# Altium PCB LCDTest2.PcbDoc
Units mil, origin at the board's own origin, x right, y up, seen from the top; angles counter-clockwise.
Board outline 1968.5 x 1968.5 mil, 4 copper layers (Top Layer, Internal Plane 1, Signal Layer 1, Bottom Layer), stack 28.35 mil thick; 154 components, 147 nets, 801 pads, 2 vias.
Unrouted connection lines stored in the file: 454.
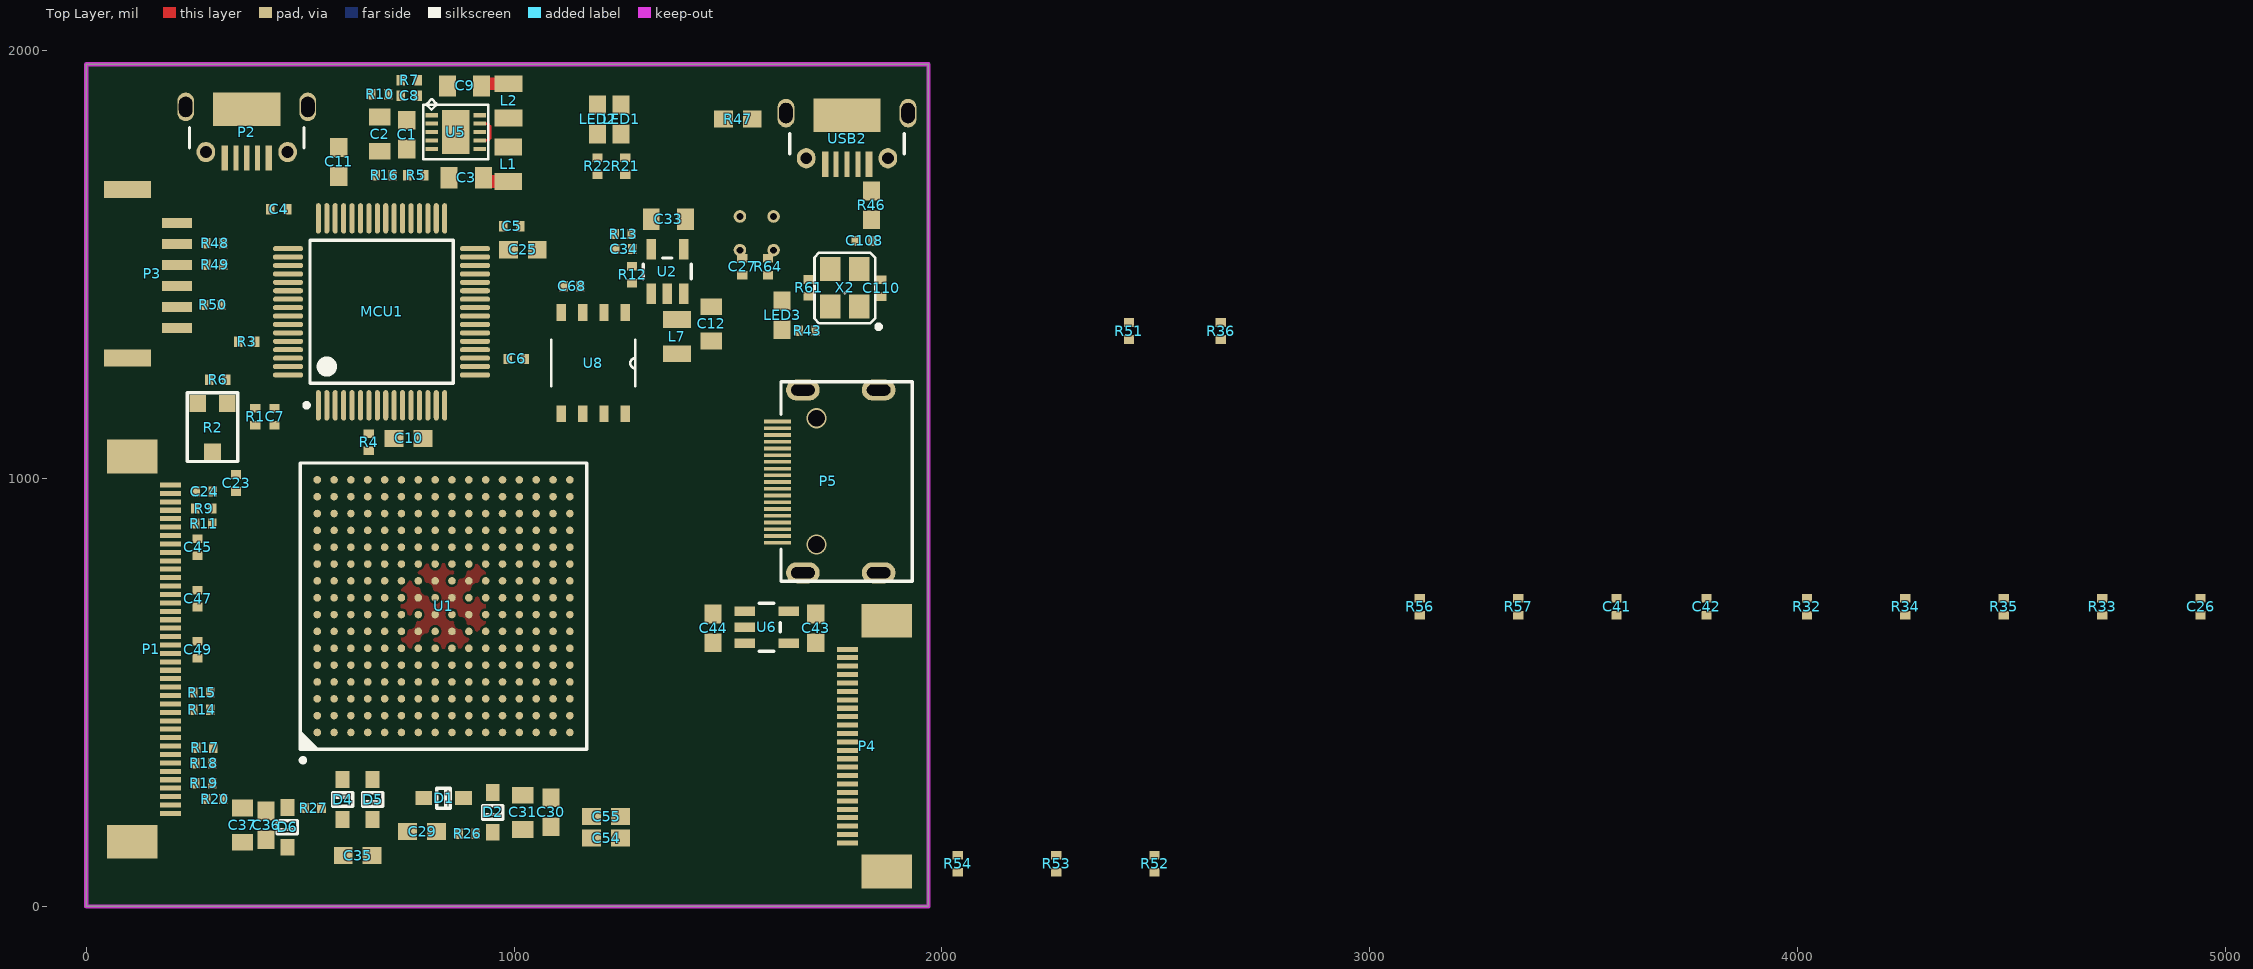
[diagram p0: Top Layer view]
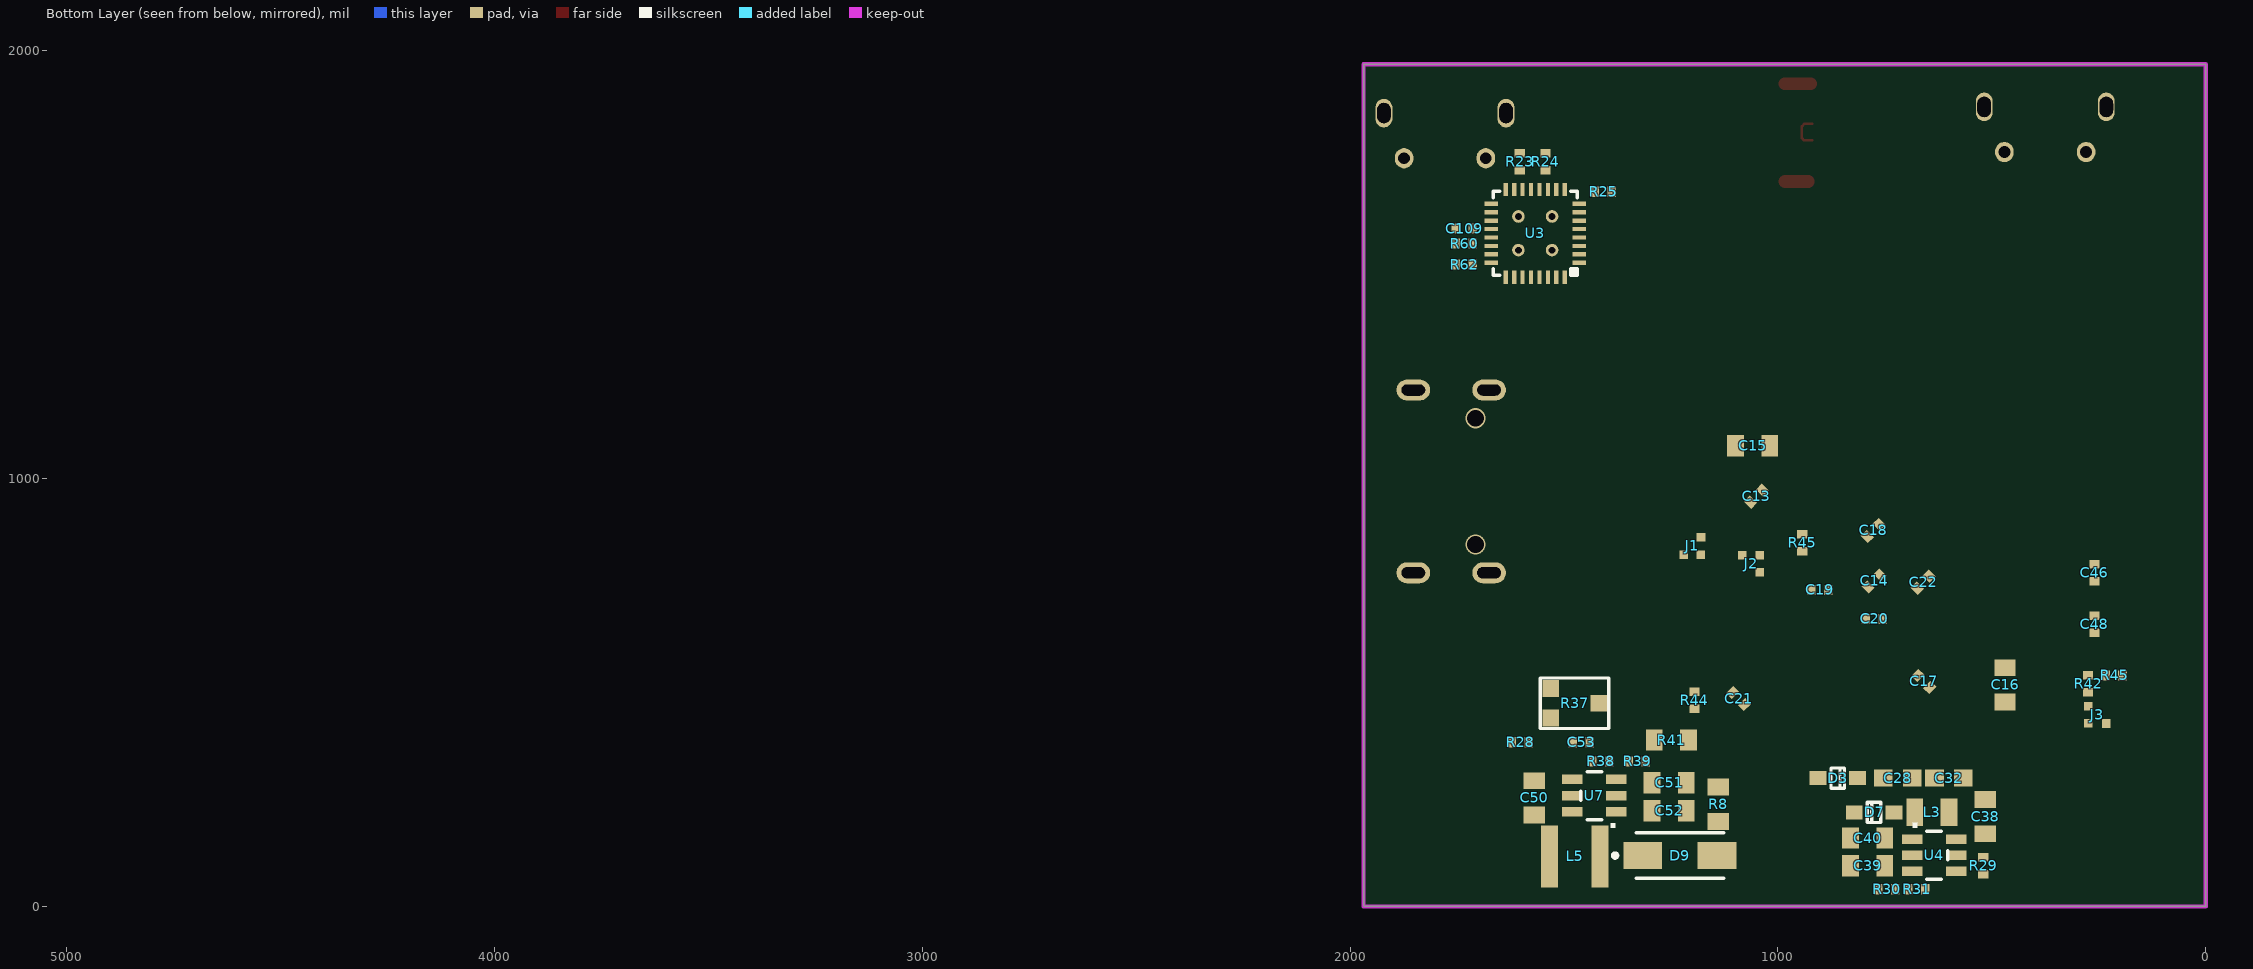
[diagram p1: Bottom Layer view, seen from below]
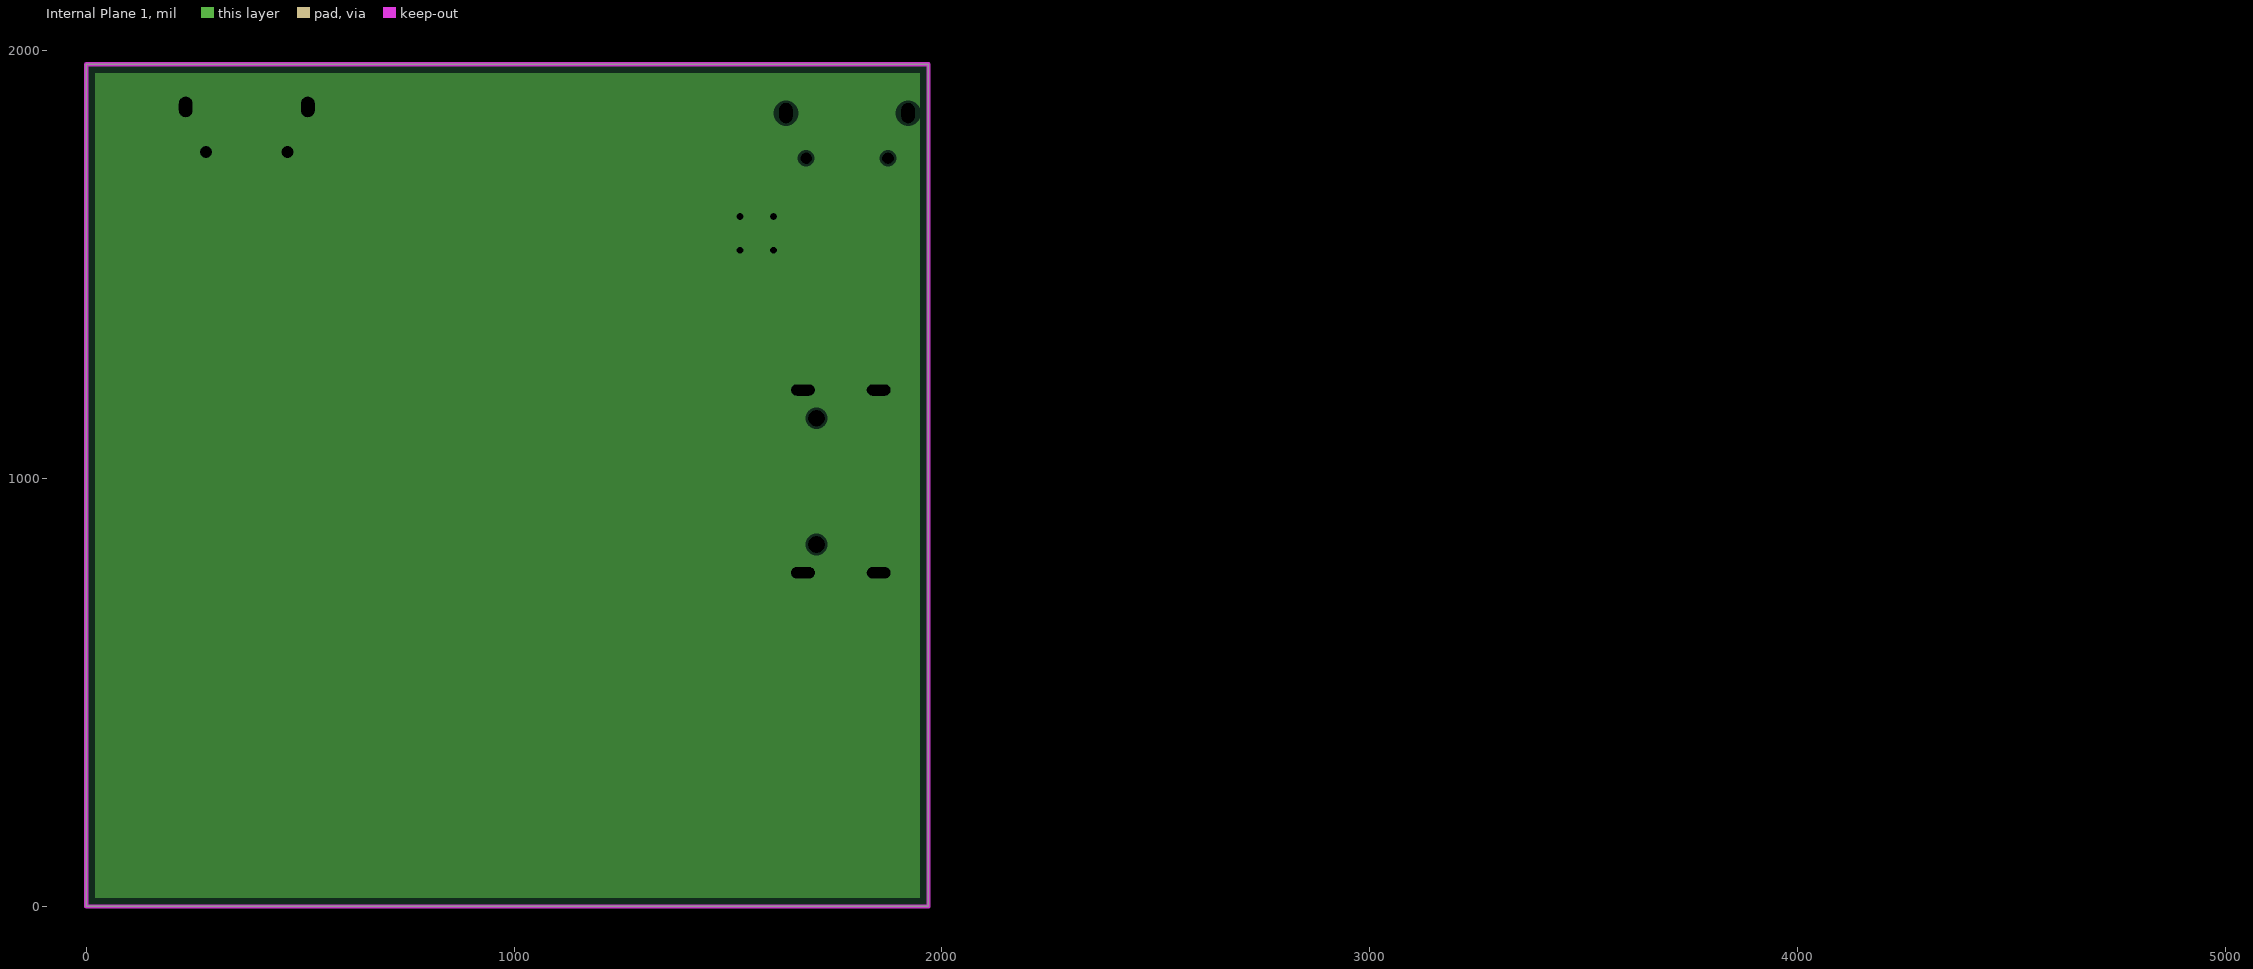
[diagram p2: Internal Plane 1, clearances drawn from the general rule]

## Layer stack, top to bottom
Top Solder: solder mask 0.4, Solder Resist, Dk 3.5
Top Layer: signal copper 1.4
Dielectric 1: core 7.7165, FR-4, Dk 4.2
Internal Plane 1: plane copper 1.4169, net GND
Dielectric 4: prepreg 5, Dk 4.2
Signal Layer 1: signal copper 1.4169
Dielectric 3: core 10, Dk 4.2
Bottom Layer: signal copper 1.4
Bottom Solder: solder mask 0.4, Solder Resist, Dk 3.5

## Board outline
0,0 0,1968.5 1968.5,1968.5 1968.5,0

## Design rules (kind name [scope] priority, off if disabled: settings)
Clearance PowerPour [InPolygon AND (InNet('1.8D') OR InNet('1.2') OR InNet('3.3D'))] p1: gap=6
Clearance "50R trace" [InNetClass('50R') vs InPolygon] p2: gap=20
Clearance [All] p3: gap=6
DiffPairsRouting USB_HS [InNet('USB_HS_P')     or InNet('USB_HS_N')] p1: maxlimit=10 minlimit=5.98 mostfreqgap=5.98 toplayer_minwidth=10 toplayer_maxwidth=15 toplayer_prefwidth=15 midlayer1_minwidth=12.01 midlayer1_maxwidth=15 midlayer1_prefwidth=15 bottomlayer_minwidth=10 bottomlayer_maxwidth=15 bottomlayer_prefwidth=15 maxuncoupledlength=500
DiffPairsRouting [All] p2: maxlimit=10 minlimit=5.98 mostfreqgap=7.99 toplayer_minwidth=5.98 toplayer_maxwidth=15 toplayer_prefwidth=10 midlayer1_minwidth=5.98 midlayer1_maxwidth=15 midlayer1_prefwidth=10 bottomlayer_minwidth=5.98 bottomlayer_maxwidth=15 bottomlayer_prefwidth=10 maxuncoupledlength=500
HoleToHoleClearance [All] p1: gap=7.87 allowstackedmicrovias=TRUE
MatchedLengths HDMI_TMDS [InNetClass('TMDS')] p1: tolerance=39.37 checknetsindiffpair=TRUE checkdiffpairvsdiffpair=TRUE checkothers=FALSE
MatchedLengths LCD_LVDS [InNetClass('LCD_LVDS')] p2: tolerance=50 checknetsindiffpair=TRUE checkdiffpairvsdiffpair=TRUE checkothers=FALSE
MinimumSolderMaskSliver [All] p1 off: minsoldermaskwidth=10
PlaneClearance [All] p1: clearance=6
PlaneConnect [All] p1: planeconnectstyle=Direct reliefexpansion=20 reliefentries=4 reliefconductorwidth=10 reliefairgap=10
PolygonConnect [All] p1: connectstyle=Direct reliefconductorwidth=10 reliefentries=4 polygonreliefangle="90 Angle" airgapwidth=10
RoomDefinition HDMI [InComponentClass('HDMI')] p1: confinementstyle=ConfineIn formatcopy=TRUE lockcomponents=FALSE outline 2012,890 2822,890 2822,1485 2012,1485
RoomDefinition camera [InComponentClass('camera')] p2: confinementstyle=ConfineIn formatcopy=TRUE lockcomponents=FALSE outline 2012,60 5112,60 5112,840 2012,840
RoomDefinition USB_HS_PHY [InComponentClass('USB_HS_PHY')] p3 off: confinementstyle=ConfineIn formatcopy=TRUE lockcomponents=FALSE outline 1727,3787 5709,3787 5709,4147 1727,4147
RoomDefinition mcu [InComponentClass('mcu')] p4 off: confinementstyle=ConfineIn formatcopy=TRUE lockcomponents=FALSE outline 1727,2167 6750,2167 6750,2809 1727,2809
RoomDefinition LCD [InComponentClass('LCD')] p5 off: confinementstyle=ConfineIn formatcopy=TRUE lockcomponents=FALSE outline 1727,1023 4657,1023 4657,2117 1727,2117
RoomDefinition FPGA [InComponentClass('FPGA')] p6 off: confinementstyle=ConfineIn formatcopy=TRUE lockcomponents=FALSE outline 1727,111 4703,111 4703,973 1727,973
RoomDefinition power [InComponentClass('power')] p7 off: confinementstyle=ConfineIn formatcopy=TRUE lockcomponents=FALSE outline 2856,355 4307,355 4307,1053 2856,1053
RoutingVias [All] p1: holewidth=11.81 width=17.72 viastyle="Through Hole" minholewidth=7.87 minwidth=17.72 maxholewidth=28 maxwidth=50
ShortCircuit ShortCircuit_NoNet [not InAnyNet vs not InAnyNet] p1: allowed=TRUE
ShortCircuit [not InNet('No Net') vs not InNet('No Net')] p2: allowed=FALSE
SilkToBoardRegionClearance [All] p1 off:
SilkToSilkClearance [All] p1 off: silktosilkclearance=10
SilkToSolderMaskClearance [IsPad] p1 off: minsilkscreentomaskgap=10 clearancetoexposedcopper=TRUE
SolderMaskExpansion [All] p1: expansion=2
UnpouredPolygon [All] p1: allowunpoured=FALSE
Width Width_1 [InNetClass('50R')] p1: maxlimit=29.61 minlimit=5.28 preferedwidth=25.2 toplayer_minwidth=9.14 toplayer_maxwidth=12.99 toplayer_prefwidth=10.92 midlayer1_maxwidth=7.78 midlayer1_prefwidth=6.44 bottomlayer_minwidth=21.41 impedancedriven=TRUE minimp=45.000000 maximp=55.000000 favimp=50.000000
Width [All] p2: maxlimit=60 minlimit=6 preferedwidth=6
20 further rules are at their usual default settings.

## Classes and differential pairs
net class TMDS: TMDS_CLK_N TMDS_CLK_P TMDS_D0_N TMDS_D0_P TMDS_D1_N TMDS_D1_P TMDS_D2_N TMDS_D2_P
net class LCD_LVDS: CK_N CK_P D0_N D0_P D1_N D1_P D2_N D2_P D3_N D3_P
net class D[9..0]: D0 D1 D2 D3 D4 D5 D6 D7 D8 D9
component class HDMI: P5 R36 R51 R52 R53 R54
component class camera: C26 C41 C42 C43 C44 P4 R32 R33 R34 R35 R56 R57 U6
net class FPGA_IO[7..0]: FPGA_IO0 FPGA_IO1 FPGA_IO2 FPGA_IO3 FPGA_IO4 FPGA_IO5 FPGA_IO6 FPGA_IO7
net class USB_HS_D[9..0]: USB_HS_D0 USB_HS_D1 USB_HS_D2 USB_HS_D3 USB_HS_D4 USB_HS_D5 USB_HS_D6 USB_HS_D7 USB_HS_D8 USB_HS_D9
component class USB_HS_PHY: C27 C108 C109 C110 R23 R24 R25 R46 R47 R60 R61 R62 R64 U3 USB2 X2
component class mcu: C4 C5 C6 C7 C10 C11 C25 LED1 LED2 MCU1 P2 R3 R4 R21 R22
component class LCD: C23 C24 C45 C46 C47 C48 C49 P1 R1 R2 R6 R9 R11 R14 R15 R17 R18 R19 R20
component class FPGA: C13 C14 C15 C16 C17 C18 C19 C20 C21 C22 C68 J1 J2 J3 LED3 P3 R42 R43 R44 R45 R48 R49 R50 U1 U8
component class power: C1 C2 C3 C8 C9 C12 C28 C29 C30 C31 C32 C33 C34 C35 C36 C37 C38 C39 C40 C50 C51 C52 C53 C54 C55 D1 D2 D3 D4 D5 D6 D7 D9 L1 L2 L3 L5 L7 R5 R7 R8 R10 R12 R13 R16 R26 R27 R28 R29 R30 R31 R37 R38 R39 R41 U2 U4 U5 U7
differential pair TMDS_D2: +TMDS_D2_P -TMDS_D2_N
differential pair TMDS_D1: +TMDS_D1_P -TMDS_D1_N
differential pair TMDS_D0: +TMDS_D0_P -TMDS_D0_N
differential pair TMDS_CLK: +TMDS_CLK_P -TMDS_CLK_N
differential pair USB_HS: +USB_HS_P -USB_HS_N
differential pair CK: +CK_P -CK_N
differential pair D0: +D0_P -D0_N
differential pair D1: +D1_P -D1_N
differential pair D2: +D2_P -D2_N
differential pair D3: +D3_P -D3_N

## Components (designator, comment, footprint, x,y, rotation, side; value= is the part's Value field where it differs from the comment)
C1 "1uF" 0603 748.87,1804.35 r270 top
C2 "10UF" 0805 685.87,1805.35 r270 top
C3 "10uF" 0805 888,1703 r0 top
C4 "0.1uF * 4" 0402 450,1630 r0 top
C5 "1n" 0402 995,1590 r180 top
C6 "1n" 0402 1005,1280 r180 top
C7 "1n" 0402 440,1145 r90 top
C8 "33pF" 0402 754.87,1895.35 r180 top
C9 "10uF" 0805 884,1918 r0 top
C10 "4.7uF" 0603 753,1094 r0 top
C11 "2.2uF" 0603 590,1740 r90 top
C12 "Cap" 0805 1460.59,1361.85 r270 top
C13 "0.1uF" 0402 1050,959 r315 bottom
C14 "0.1uF" 0402 775,761 r315 bottom
C15 "Cap" 0805 1059,1077 r0 bottom
C16 "Cap" 0805 469,518 r270 bottom
C17 "0.1uF" 0402 659,526 r225 bottom
C18 "0.1uF" 0402 777,879 r315 bottom
C19 "0.1uF" 0402 902,740 r0 bottom
C20 "0.1uF" 0402 775,672 r180 bottom
C21 "0.1uF" 0402 1092,486 r225 bottom
C22 "0.1uF" 0402 660,758 r315 bottom
C23 "0.1uF" 0402 350,990 r270 top
C24 "1uF" 0402 275,970 r0 top
C25 "2.2uF" 0603 1020,1535 r0 top
C26 "1uF" 0402 4942,700 r90 top
C27 "1uF" 0402 1533.15,1495.59 r90 top
C28 "1uF" 0603 720,300 r180 bottom
C29 "0.1uF" 0603 785,175 r180 top
C30 "1uF" 0603 1086,220 r90 top
C31 "10uF" 0805 1020,220 r270 top
C32 "1uF" 0603 600,300 r0 bottom
C33 "Cap" 0805 1360.59,1606.85 r0 top
C34 "22pF" 0402 1255.59,1536.85 r0 top
C35 "0.1uF" 0603 634,119 r0 top
C36 "1uF" 0603 420,190 r270 top
C37 "10uF" 0805 365,190 r90 top
C38 "10uF" 0805 515,210 r90 bottom
C39 "10uF" 0805 790,95 r0 bottom
C40 "10uF" 0805 790,160 r0 bottom
C41 "0.1uF" 0402 3577,700 r90 top
C42 "0.1uF" 0402 3787,700 r90 top
C43 "4.7uF" 0603 1705,650 r90 top
C44 "4.7uF" 0603 1465,650 r90 top
C45 "NC" 0402 260,840 r270 top
C46 "NC" 0402 260,780 r270 bottom
C47 "NC" 0402 260,720 r270 top
C48 "NC" 0402 260,660 r270 bottom
C49 "NC" 0402 260,600 r270 top
C50 "10uF" 0805 1569,254 r270 bottom
C51 "10uF" 0805 1254,289 r180 bottom
C52 "10uF" 0805 1254,224 r180 bottom
C53 "0.1uF" 0402 1459,384 r0 bottom
C54 "10uF" 0603 1215,160 r180 top
C55 "10uF" 0603 1215,210 r180 top
C68 "0.1uF" 0402 1135,1450 r0 top
C108 "10pF" 0402 1818.15,1555.59 r180 top
C109 "1uF" 0402 1733.15,1584.59 r0 bottom
C110 "10pF" 0402 1858.15,1445.59 r270 top
D1 "Diode 1N4148" LC-SOD-323 835,253 r180 top
D2 "D Zener, 15V" LC-SOD-323 950,220 r90 top
D3 "Diode 1N4148" LC-SOD-323 860,300 r0 bottom
D4 "Diode 1N4148" LC-SOD-323 599,250 r270 top
D5 "Diode 1N4148" LC-SOD-323 669,250 r90 top
D6 "D Zener, 6.8V" LC-SOD-323 470,185 r90 top
D7 "Diode" LC-SOD-323 775,220 r180 bottom
D9 "Diode" SMA 1229,119 r180 bottom
J1 "jumper" 0402J 1180,822 r0 bottom
J2 "jumper" 0402J 1042,821 r270 bottom
J3 "jumper" 0402J 274,428 r90 bottom
L1 "2.2UH" 0806 986,1735 r270 top
L2 "2.2uH" 0806 987,1883 r90 top
L3 "10uH" 0806 640,220 r0 bottom
L5 "6.8uH" L4015 1534,117 r180 bottom
L7 "2.2uH" 0806 1380.59,1331.85 r270 top
LED1 "LED0" 0603 1250,1840 r270 top
LED2 "LED0" 0603 1195,1840 r270 top
LED3 "LED0" 0603 1626.15,1381.59 r90 top
MCU1 "STM32F103R8T6" LQFP64_N 690,1390 r90 top
P1 "LCD_40P_LVDS" FPC-0.5mm-40 196.85,985.2 r270 top
P2 "SWD_MicroUSB" MICRO-YZX 375,1980 r180 top
P3 "JTAG-6P" GH1.25-6 155,1475 r270 top
P4 "Camera24P-2" FPC-0.5mm-24 1825,375 r270 top
P5 "HDMI" HDMI 1675,780 r90 top
R1 "0R" 0402 395,1145 r90 top
R2 "RPot" POT1 295,1115 r180 top
R3 "10k" 0402 375,1320 r0 top
R4 "10k" 0402 660,1085 r270 top
R5 "180k" 0402 769.87,1709.35 r180 top
R6 "1k" 0402 307,1231 r0 top
R7 "300k" 0402 754.87,1931.35 r180 top
R8 "1R" 0805 1139,239 r90 bottom
R9 "10k" 0402 275,930 r180 top
R10 "68k" 0402 685.87,1898.35 r180 top
R11 "10k" 0402 275,895 r180 top
R12 "10k" 0402 1275.59,1476.85 r90 top
R13 "45k" 0402 1255.59,1571.85 r180 top
R14 "10k" 0402 270,460 r0 top
R15 "NC" 0402 270,500 r180 top
R16 "180k" 0402 696.87,1709.35 r180 top
R17 "10k" 0402 277,371 r180 top
R18 "10k" 0402 275,335 r180 top
R19 "10k" 0402 275,288 r180 top
R20 "10k" 0402 300,251 r180 top
R21 "10k" 0402 1260,1730 r90 top
R22 "10k" 0402 1195,1730 r90 top
R23 "10k" 0402 1603.15,1740.59 r90 bottom
R24 "10k" 0402 1543.15,1740.59 r90 bottom
R25 "10k" 0402 1408.15,1670.59 r180 bottom
R26 "1k" 0402 890,170 r0 top
R27 "1k" 0402 530,230 r180 top
R28 "45k" 0402 1602,384 r0 bottom
R29 "45k" 0402 520,95 r90 bottom
R30 "150k" 0402 745,40 r0 bottom
R31 "10k" 0402 675,40 r0 bottom
R32 "NC/0R" 0402 4022,700 r90 top
R33 "0R" 0402 4712,700 r90 top
R34 "NC/0R" 0402 4252,700 r90 top
R35 "0R" 0402 4482,700 r90 top
R36 "10k" 0402 2652,1345 r90 top
R37 "RPot" POT1 1470,475 r270 bottom
R38 "1k" 0402 1414,339 r180 bottom
R39 "1k" 0402 1329,339 r0 bottom
R41 "1R" 0805 1249,389 r180 bottom
R42 "10k" 0402 275,520 r90 bottom
R43 "10k" 0402 1685.15,1345.59 r180 top
R44 "10k" 0402 1195,482 r270 bottom
R45 "1k" 0402 214,540 r0 bottom
R45 "NC" 0402 943,850 r90 bottom
R46 "FB" 0603 1835.15,1638.59 r90 top
R47 "FB" 0603 1523.15,1840.59 r180 top
R48 "10k" 0402 300,1550 r0 top
R49 "10k" 0402 300,1500 r0 top
R50 "10k" 0402 295,1406 r0 top
R51 "NC/0R" 0402 2437,1345 r90 top
R52 "10k" 0402 2497,100 r90 top
R53 "10k" 0402 2267,100 r90 top
R54 "10k" 0402 2037,100 r90 top
R56 "4.7k" 0402 3117,700 r90 top
R57 "4.7k" 0402 3347,700 r90 top
R60 "10k" 0402 1733.15,1549.59 r180 bottom
R61 "1MR" 0402 1688.15,1445.59 r90 top
R62 "8.06k 1%" 0402 1733.15,1500.59 r180 bottom
R64 "10k" 0402 1593.15,1495.59 r90 top
U1 "XC6SLX16-2FT256C" FT256 835,702 r90 top
U2 "RT8059" SOT23-5 1358.09,1483.82 r0 top
U3 "USB3320" USB3300 1567.15,1573.59 r0 bottom
U4 "SY7152" SOT23-6 635,120 r270 bottom
U5 "Tps62410" DFN-10P-3X3 864.87,1810.35 r0 top
U6 "RT9013-28GB" SOT23-5 1590,653 r270 top
U7 "SY7200" SOT23-6 1429,259 r90 bottom
U8 "M25P16" SO8 1185,1270 r270 top
USB2 "USB Micro Type B" MICRO-YZX 1778.15,1965.59 r180 top
X2 "24mhz" OSCILLATOR-3.2X2.5 1773.15,1445.59 r90 top

## Footprints (in the part's own frame and the unit in brackets; to place one, negate y for a bottom-side part, rotate by r counter-clockwise, add the part's x,y. Pads: shape width x height; smd on the part's side, far side on the other; paste and mask are expansions set on the pad)
0402 [mil] "0402-RES"
  rect 20x24 smd: 1(-19.68,0) 2(20,0)
0402J [mil] "0402-RES"
  rect 20x20 smd: 1(40,0) 2(0,0) 3(-0.35,-41.34)
0603 [mil] "0603-RES"
  rect 44x40 smd: 1(-33.46,0) 2(34,0)
0805 [mil]
  rect 39.37x50 smd: 1(-40,0) 2(40,0)
  body extent -50,-30 50,30, height 31
0806 [mm]
  rect 1x1.65 smd: 1(-1.016,0) 2(1.016,0)
  body extent -1,-0.8 1,0.8, height 0.5
DFN-10P-3X3 [mm]
  rect 0.75x0.25 smd mask+0.064: 1(-1.451,0.999) 2(-1.451,0.499) 3(-1.451,-0.001) 4(-1.451,-0.501) 5(-1.451,-1.001) 6(1.4,-1.001) 7(1.4,-0.501) 8(1.4,-0.001) 9(1.4,0.499) 10(1.4,0.999)
  rect 1.64x2.6 smd: 11(-0.025,-0.001)
  silkscreen extent -1.96,-1.63 1.9,1.95
FPC-0.5mm-24 [mm]
  rect 2x3 smd: 0(-7.445,1.163) 0(7.445,1.163)
  rect 0.3x1.25 smd: 1(5.755,-1.163) 2(5.255,-1.163) 3(4.755,-1.163) 4(4.255,-1.163) 5(3.755,-1.163) 6(3.255,-1.163) 7(2.755,-1.163) 8(2.255,-1.163) 9(1.755,-1.163) 10(1.255,-1.163) 11(0.755,-1.163) 12(0.255,-1.163) 13(-0.245,-1.163) 14(-0.745,-1.163) 15(-1.245,-1.163) 16(-1.745,-1.163) 17(-2.245,-1.163) 18(-2.745,-1.163) 19(-3.245,-1.163) 20(-3.745,-1.163) 21(-4.245,-1.163) 22(-4.745,-1.163) 23(-5.245,-1.163) 24(-5.745,-1.163)
FPC-0.5mm-40 [mm]
  rect 2x3 smd: 0(-1.69,-2.285) 0(21.19,-2.285)
  rect 0.3x1.25 smd: 1(0,0) 2(0.5,0) 3(1,0) 4(1.5,0) 5(2,0) 6(2.5,0) 7(3,0) 8(3.5,0) 9(4,0) 10(4.5,0) 11(5,0) 12(5.5,0) 13(6,0) 14(6.5,0) 15(7,0) 16(7.5,0) 17(8,0) 18(8.5,0) 19(9,0) 20(9.5,0) 21(10,0) 22(10.5,0) 23(11,0) 24(11.5,0) 25(12,0) 26(12.5,0) 27(13,0) 28(13.5,0) 29(14,0) 30(14.5,0) 31(15,0) 32(15.5,0) 33(16,0) 34(16.5,0) 35(17,0) 36(17.5,0) 37(18,0) 38(18.5,0) 39(19,0) 40(19.5,0)
FT256 [mm] "BGA, 256-Leads, Body 17x17mm, Pitch 1mm"
  round 0.45 smd: A1(-7.5,7.5) A2(-6.5,7.5) A3(-5.5,7.5) A4(-4.5,7.5) A5(-3.5,7.5) A6(-2.5,7.5) A7(-1.5,7.5) A8(-0.5,7.5) A9(0.5,7.5) A10(1.5,7.5) A11(2.5,7.5) A12(3.5,7.5) A13(4.5,7.5) A14(5.5,7.5) A15(6.5,7.5) A16(7.5,7.5) B1(-7.5,6.5) B2(-6.5,6.5) B3(-5.5,6.5) B4(-4.5,6.5) B5(-3.5,6.5) B6(-2.5,6.5) B7(-1.5,6.5) B8(-0.5,6.5) B9(0.5,6.5) B10(1.5,6.5) B11(2.5,6.5) B12(3.5,6.5) B13(4.5,6.5) B14(5.5,6.5) B15(6.5,6.5) B16(7.5,6.5) C1(-7.5,5.5) C2(-6.5,5.5) C3(-5.5,5.5) C4(-4.5,5.5) C5(-3.5,5.5) C6(-2.5,5.5) C7(-1.5,5.5) C8(-0.5,5.5) C9(0.5,5.5) C10(1.5,5.5) C11(2.5,5.5) C12(3.5,5.5) C13(4.5,5.5) C14(5.5,5.5) C15(6.5,5.5) C16(7.5,5.5) D1(-7.5,4.5) D2(-6.5,4.5) D3(-5.5,4.5) D4(-4.5,4.5) D5(-3.5,4.5) D6(-2.5,4.5) D7(-1.5,4.5) D8(-0.5,4.5) D9(0.5,4.5) D10(1.5,4.5) D11(2.5,4.5) D12(3.5,4.5) D13(4.5,4.5) D14(5.5,4.5) D15(6.5,4.5) D16(7.5,4.5) E1(-7.5,3.5) E2(-6.5,3.5) E3(-5.5,3.5) E4(-4.5,3.5) E5(-3.5,3.5) E6(-2.5,3.5) E7(-1.5,3.5) E8(-0.5,3.5) E9(0.5,3.5) E10(1.5,3.5) E11(2.5,3.5) E12(3.5,3.5) E13(4.5,3.5) E14(5.5,3.5) E15(6.5,3.5) E16(7.5,3.5) F1(-7.5,2.5) F2(-6.5,2.5) F3(-5.5,2.5) F4(-4.5,2.5) F5(-3.5,2.5) F6(-2.5,2.5) F7(-1.5,2.5) F8(-0.5,2.5) F9(0.5,2.5) F10(1.5,2.5) F11(2.5,2.5) F12(3.5,2.5) F13(4.5,2.5) F14(5.5,2.5) F15(6.5,2.5) F16(7.5,2.5) G1(-7.5,1.5) G2(-6.5,1.5) G3(-5.5,1.5) G4(-4.5,1.5) G5(-3.5,1.5) G6(-2.5,1.5) G7(-1.5,1.5) G8(-0.5,1.5) G9(0.5,1.5) G10(1.5,1.5) G11(2.5,1.5) G12(3.5,1.5) G13(4.5,1.5) G14(5.5,1.5) G15(6.5,1.5) G16(7.5,1.5) H1(-7.5,0.5) H2(-6.5,0.5) H3(-5.5,0.5) H4(-4.5,0.5) H5(-3.5,0.5) H6(-2.5,0.5) H7(-1.5,0.5) H8(-0.5,0.5) H9(0.5,0.5) H10(1.5,0.5) H11(2.5,0.5) H12(3.5,0.5) H13(4.5,0.5) H14(5.5,0.5) H15(6.5,0.5) H16(7.5,0.5) J1(-7.5,-0.5) J2(-6.5,-0.5) J3(-5.5,-0.5) J4(-4.5,-0.5) J5(-3.5,-0.5) J6(-2.5,-0.5) J7(-1.5,-0.5) J8(-0.5,-0.5) J9(0.5,-0.5) J10(1.5,-0.5) J11(2.5,-0.5) J12(3.5,-0.5) J13(4.5,-0.5) J14(5.5,-0.5) J15(6.5,-0.5) J16(7.5,-0.5) K1(-7.5,-1.5) K2(-6.5,-1.5) K3(-5.5,-1.5) K4(-4.5,-1.5) K5(-3.5,-1.5) K6(-2.5,-1.5) K7(-1.5,-1.5) K8(-0.5,-1.5) K9(0.5,-1.5) K10(1.5,-1.5) K11(2.5,-1.5) K12(3.5,-1.5) K13(4.5,-1.5) K14(5.5,-1.5) K15(6.5,-1.5) K16(7.5,-1.5) L1(-7.5,-2.5) L2(-6.5,-2.5) L3(-5.5,-2.5) L4(-4.5,-2.5) L5(-3.5,-2.5) L6(-2.5,-2.5) L7(-1.5,-2.5) L8(-0.5,-2.5) L9(0.5,-2.5) L10(1.5,-2.5) L11(2.5,-2.5) L12(3.5,-2.5) L13(4.5,-2.5) L14(5.5,-2.5) L15(6.5,-2.5) L16(7.5,-2.5) M1(-7.5,-3.5) M2(-6.5,-3.5) M3(-5.5,-3.5) M4(-4.5,-3.5) M5(-3.5,-3.5) M6(-2.5,-3.5) M7(-1.5,-3.5) M8(-0.5,-3.5) M9(0.5,-3.5) M10(1.5,-3.5) M11(2.5,-3.5) M12(3.5,-3.5) M13(4.5,-3.5) M14(5.5,-3.5) M15(6.5,-3.5) M16(7.5,-3.5) N1(-7.5,-4.5) N2(-6.5,-4.5) N3(-5.5,-4.5) N4(-4.5,-4.5) N5(-3.5,-4.5) N6(-2.5,-4.5) N7(-1.5,-4.5) N8(-0.5,-4.5) N9(0.5,-4.5) N10(1.5,-4.5) N11(2.5,-4.5) N12(3.5,-4.5) N13(4.5,-4.5) N14(5.5,-4.5) N15(6.5,-4.5) N16(7.5,-4.5) P1(-7.5,-5.5) P2(-6.5,-5.5) P3(-5.5,-5.5) P4(-4.5,-5.5) P5(-3.5,-5.5) P6(-2.5,-5.5) P7(-1.5,-5.5) P8(-0.5,-5.5) P9(0.5,-5.5) P10(1.5,-5.5) P11(2.5,-5.5) P12(3.5,-5.5) P13(4.5,-5.5) P14(5.5,-5.5) P15(6.5,-5.5) P16(7.5,-5.5) R1(-7.5,-6.5) R2(-6.5,-6.5) R3(-5.5,-6.5) R4(-4.5,-6.5) R5(-3.5,-6.5) R6(-2.5,-6.5) R7(-1.5,-6.5) R8(-0.5,-6.5) R9(0.5,-6.5) R10(1.5,-6.5) R11(2.5,-6.5) R12(3.5,-6.5) R13(4.5,-6.5) R14(5.5,-6.5) R15(6.5,-6.5) R16(7.5,-6.5) T1(-7.5,-7.5) T2(-6.5,-7.5) T3(-5.5,-7.5) T4(-4.5,-7.5) T5(-3.5,-7.5) T6(-2.5,-7.5) T7(-1.5,-7.5) T8(-0.5,-7.5) T9(0.5,-7.5) T10(1.5,-7.5) T11(2.5,-7.5) T12(3.5,-7.5) T13(4.5,-7.5) T14(5.5,-7.5) T15(6.5,-7.5) T16(7.5,-7.5)
  silkscreen extent -9.27,-8.5 8.5,8.5, body extent -8.5,-8.5 8.5,8.5, height 1.55
GH1.25-6 [mm]
  rect 1x2.8 smd: 0(-5.1,-1.5) 0(4.9,-1.5)
  rect 0.6x1.8 smd: 1(-3.125,1.45) 2(-1.875,1.45) 3(-0.625,1.45) 4(0.625,1.45) 5(1.875,1.45) 6(3.125,1.45)
  body extent -5.48,-3.1 5.27,1.75, height 4.25
HDMI [mm]
  oval 1.25x2 hole 0.65 slot 1.4 at 90 deg: 0(0,0) 0(0,-4.5) 0(10.85,-4.5) 0(10.85,0)
  rect 0.22x1.6 smd: 1(8.985,1.5) 2(8.585,1.5) 3(8.185,1.5) 4(7.785,1.5) 5(7.385,1.5) 6(6.985,1.5) 7(6.585,1.5) 8(6.185,1.5) 9(5.785,1.5) 10(5.385,1.5) 11(4.985,1.5) 12(4.585,1.5) 13(4.185,1.5) 14(3.785,1.5) 15(3.385,1.5) 16(2.985,1.5) 17(2.585,1.5) 18(2.185,1.5) 19(1.785,1.5)
  silkscreen extent -0.5,-6.5 11.35,1.3
L4015 [mm]
  rect 1x3.7 smd: 1(0,0) 2(3,0)
LC-SOD-323 [mm]
  rect 1x0.83 smd: 1(1.18,0) 2(-1.18,0)
  silkscreen extent -0.4,-0.6 0.4,0.6, body extent -1.35,-0.62 1.35,0.62, height 1.1
LQFP64_N [mm]
  oval 1.8x0.3 smd: 1(-5.55,3.75) 2(-5.55,3.25) 3(-5.55,2.75) 4(-5.55,2.25) 5(-5.55,1.75) 6(-5.55,1.25) 7(-5.55,0.75) 8(-5.55,0.25) 9(-5.55,-0.25) 10(-5.55,-0.75) 11(-5.55,-1.25) 12(-5.55,-1.75) 13(-5.55,-2.25) 14(-5.55,-2.75) 15(-5.55,-3.25) 16(-5.55,-3.75) 33(5.55,-3.75) 34(5.55,-3.25) 35(5.55,-2.75) 36(5.55,-2.25) 37(5.55,-1.75) 38(5.55,-1.25) 39(5.55,-0.75) 40(5.55,-0.25) 41(5.55,0.25) 42(5.55,0.75) 43(5.55,1.25) 44(5.55,1.75) 45(5.55,2.25) 46(5.55,2.75) 47(5.55,3.25) 48(5.55,3.75)
  oval 0.3x1.8 smd: 17(-3.75,-5.55) 18(-3.25,-5.55) 19(-2.75,-5.55) 20(-2.25,-5.55) 21(-1.75,-5.55) 22(-1.25,-5.55) 23(-0.75,-5.55) 24(-0.25,-5.55) 25(0.25,-5.55) 26(0.75,-5.55) 27(1.25,-5.55) 28(1.75,-5.55) 29(2.25,-5.55) 30(2.75,-5.55) 31(3.25,-5.55) 32(3.75,-5.55) 49(3.75,5.55) 50(3.25,5.55) 51(2.75,5.55) 52(2.25,5.55) 53(1.75,5.55) 54(1.25,5.55) 55(0.75,5.55) 56(0.25,5.55) 57(-0.25,5.55) 58(-0.75,5.55) 59(-1.25,5.55) 60(-1.75,5.55) 61(-2.25,5.55) 62(-2.75,5.55) 63(-3.25,5.55) 64(-3.75,5.55)
  silkscreen extent -5.67,-4.25 4.25,4.57
MICRO-YZX [mm]
  rect 0.4x1.5 smd: 1(-1.3,5.85) 5(1.3,5.85)
  rect 0.3x1.5 smd: 2(-0.65,5.85) 3(0,5.85) 4(0.65,5.85)
  oval 1x1.7 hole 0.8 slot 1.2 at 90 deg: 5(-3.625,2.82) 5(3.625,2.82)
  oval 1.1x1.2 hole 0.7: 5(-2.425,5.5) 5(2.425,5.5)
  rect 4x2 smd: 5(0,2.95)
  silkscreen extent -3.4,4.05 3.4,5.25, body extent -4.02,0.33 3.98,5.93, height 2.6
OSCILLATOR-3.2X2.5 [mil] "OSCILLATOR-3.2X2.5"
  rect 56x48 smd: 1(-43.31,-33.46) 2(44,-33.46) 3(44,34) 4(-43.31,34)
  silkscreen extent -95,-83 83,71
POT1 [mm]
  rect 1x1 smd: 1(-0.875,-1.55) 2(0.875,-1.55) 3(0,1.325)
  silkscreen extent -1.5,-2.17 1.5,1.9
SMA [mm]
  rect 2.3x1.6 smd: 1(-2.2,0) 2(2.2,0)
  silkscreen extent -3.98,-1.35 2.6,1.35
SO8 [mm]
  rect 1x0.559 smd: 1(-3,1.905) 2(-3,0.635) 3(-3,-0.635) 4(-3,-1.905) 5(3,-1.905) 6(3,-0.635) 7(3,0.635) 8(3,1.905)
  silkscreen extent -1.37,-2.5 1.37,2.5, body extent -3,-2.45 3,2.45, height 1.63
SOT23-5 [mil] "SOT23-5"
  rect 22x48 smd: 1(-37.4,-51.19) 2(0,-51.19) 3(38,-51.19) 4(38,52) 5(-37.4,52)
  silkscreen extent -56,-17 56,32
SOT23-6 [mil] "SOT23-5"
  rect 22x48 smd: 1(-37.4,-51.18) 2(0,-51.18) 3(38,-51.18) 4(38,52) 5(0,52.01) 6(-37.4,52)
  silkscreen extent -76,-50 56,32
USB3300 [mm]
  round 0.75 hole 0.4: 0(-1,-1) 0(-1,1) 0(1,-1) 0(1,1)
  rect 0.8x0.25 smd: 1(-2.6,1.75) 2(-2.6,1.25) 3(-2.6,0.75) 4(-2.6,0.25) 5(-2.6,-0.25) 6(-2.6,-0.75) 7(-2.6,-1.25) 8(-2.6,-1.75) 17(2.6,-1.75) 18(2.6,-1.25) 19(2.6,-0.75) 20(2.6,-0.25) 21(2.6,0.25) 22(2.6,0.75) 23(2.6,1.25) 24(2.6,1.75)
  rect 0.25x0.8 smd: 9(-1.75,-2.6) 10(-1.25,-2.6) 11(-0.75,-2.6) 12(-0.25,-2.6) 13(0.25,-2.6) 14(0.75,-2.6) 15(1.25,-2.6) 16(1.75,-2.6) 25(1.75,2.6) 26(1.25,2.6) 27(0.75,2.6) 28(0.25,2.6) 29(-0.25,2.6) 30(-0.75,2.6) 31(-1.25,2.6) 32(-1.75,2.6)
  silkscreen extent -2.5,-2.5 2.5,2.5, body extent -2.5,-2.5 2.5,2.5, height 0.85

## Part data
C1 C2: library part CAP/0402
C3 C9 C13 C14 C17 C18 C19 C20 C21 C22 C23 C24 C28 C29 C30 C31 C32 C34 C35 C36 C37 C38 C39 C40 C43 C44 C45 C46 C47 C48 C49 C50 C51 C52 C53 C54 C55: library part Cap, "Capacitor"
C4 C5 C6 C7 C8 C10 C11 C25 C26 C27 C41 C42 C68 C108 C109 C110: library part CAP0402-CAP, "<b>Capacitor</b> / Standard 0603 ceramic capacitor, and 0.1\" leaded capacitor."
C12 C15 C16 C33: "Capacitor"
D1 D3 D4 D5: "High Conductance Fast Diode"
D2 D6: library part "D Zener", "Zener Diode"
D7 D9: "Default Diode"
J1 J2 J3: library part SW-SPDT, "SPDT Subminiature Toggle Switch, Right Angle Mounting, Vertical Actuation"
L1 L2: library part L/2.5*2.0
L3 L5 L7: library part Inductor, "Inductor"
LED1 LED2 LED3: "Typical INFRARED GaAs LED"
MCU1: "STM32 ARM-based 32-bit MCU with 64 Kbytes Flash, 64-pin LQFP, Industrial Temperature"
P2: "Connector SMD USB Micro Type B middle mount"
R1 R3 R4 R5 R6 R7 R8 R9 R10 R11 R12 R13 R14 R15 R16 R17 R18 R19 R20 R21 R22 R23 R24 R25 R26 R27 R28 R29 R30 R31 R32 R33 R34 R35 R36 R38 R39 R41 R42 R43 R44 R45 R45 R46 R47 R48 R49 R50 R51 R52 R53 R54 R56 R57 R60 R61 R62 R64: library part Res2, "Resistor"
R2 R37: "Potentiometer"
U1: "Spartan-6 LX 1.2V FPGA, 186 User I/Os, 256-Ball Fine-Pitch Thin BGA (1.0mm Pitch), Speed Grade 2, Commercial Grade"
U6: library part LP5907
USB2: library part USB_Micro_TypeB, "Connector SMD USB Micro Type B middle mount"
X2: library part OSCILLATOR-3.2X2.5, "Crystal Oscillator in 3.2x2.5 SMD"

## Via types
v1: diameter 47.24, hole 39.37, Top Layer to Bottom Layer, 2 vias

## Nets (pads, with @x,y where several pads share a name; then routed paths per layer and width w, separated by ;. In a path a pad name is that pad's centre, name@x,y a point inside that pad or via, vN(x,y) a via of type N, cw(c..) or ccw(c..) an arc to the next point about the centre after c; other vN are vias at no path point)
1.2: C3.2 C19.1 C20.1 L1.2 R5.1 R32.2 U1.G7 U1.G9 U1.H8 U1.H10 U1.J7 U1.J9 U1.K8 U1.K10 U5.4 | length 54
  Top Layer w30: C3.2@929,1695 L1.2@983,1695
1.8: C12.2 C27.1 C34.1 L7.2 R13.2 U3.28 U3.30
2.8: C43.2 R33.2 R35.1 U6.5
3.3D: C4.2 C5.2 C6.2 C7.2 C8.1 C9.2 C10.2 C13.1 C14.1 C15.2 C16.2 C17.1 C18.1 C21.1 C22.1 C24.1 C44.2 C68.2 C109.1 J1.1 J2.1 J3.1 L2.2 LED1.1 LED2.1 MCU1.1 MCU1.13 MCU1.19 MCU1.32 MCU1.48 MCU1.64 P1.2 P1.3 P3.4 R1.2 R4.2 R7.1 R9.1 R11.1 R14.2 R23.2 R24.2 R25.2 R34.1 R44.1 R45.2@943,870 U1.B4 U1.B9 U1.B13 U1.D2 U1.D7 U1.D10 U1.D15 U1.E5 U1.F8 U1.F11 U1.G4 U1.G10 U1.G13 U1.H6 U1.J2 U1.J10 U1.J15 U1.K4 U1.K13 U1.L6 U1.L9 U1.N2 U1.N7 U1.N10 U1.N15 U1.R4 U1.R8 U1.R13 U3.20 U3.21 U3.32 U6.1 U6.3 U8.3 U8.7 U8.8 | length 59
  Top Layer w30: C9.2@924,1923 L2.2@983,1923
5V: C1.2 C2.2 C33.2 C38.2 C50.2 L3.1 L5.1 P2.1 R29.2 R46.1 R51.1 R52.1 R53.1 R54.1 R60.1 U2.1 U2.4 U4.5 U5.3 U5.7 U5.9 U7.6 | length 80.4
  Top Layer w6: U5.7 938.63,1790.63 944,1796 944,1823.52 937.52,1830 U5.9
AVDD: C39.2 C40.2 D3.1 D7.2 P1.29 R30.2
CCLK: MCU1.55 U1.R11 U8.6
CK_N: C48.1 P1.17 U1.A9
CK_P: C48.2 P1.18 U1.C9
D0: P4.1
D0_N: C45.1 P1.8 U1.A12
D0_P: C45.2 P1.9 U1.B12
D1: P4.2
D1_N: C46.1 P1.11 U1.A11
D1_P: C46.2 P1.12 U1.C11
D2: P4.6
D2_N: C47.1 P1.14 U1.A10
D2_P: C47.2 P1.15 U1.B10
D3: P4.4
D3_N: C49.1 P1.20 U1.A6
D3_P: C49.2 P1.21 U1.B6
D4: P4.3
D5: P4.5
D6: P4.7
D7: P4.9
D8: P4.11
D9: P4.13
DATA: MCU1.23 U1.P10 U8.2
DONE: R43.1 U1.P13
DOVDD: C42.2 P4.14 R34.2 R35.2 R56.1 R57.1
FLASH_CS: U1.T3 U8.1
FLASH_DI: U1.T10 U8.5
FPGA_CLK: MCU1.58 U1.C10
FPGA_CLK2: MCU1.59 U1.E10
FPGA_MCLK: MCU1.40 U1.T8
GND: C1.1 C2.1 C3.1 C4.1 C5.1 C6.1 C7.1 C9.1 C10.1 C11.2 C12.1 C13.2 C14.2 C15.1 C16.1 C17.2 C18.2 C19.2 C20.2 C21.2 C22.2 C23.2 C24.2 C25.2 C26.1 C27.2 C29.2 C30.2 C31.1 C33.1 C35.2 C36.2 C37.1 C38.1 C39.1 C40.1 C41.1 C42.1 C43.1 C44.1 C50.1 C51.1 C52.1 C53.2 C54.1 C55.1 C68.1 C108.1 C109.2 C110.1 D2.1 D5.2 D6.2 J1.3 J2.3 J3.3 LED3.2 MCU1.12 MCU1.18 MCU1.63 P1.0 P1.7 P1.10 P1.13 P1.16 P1.19 P1.22 P1.25 P1.30 P2.5 P3.0 P3.6 P4.0 P4.10 P4.23 P5.0 P5.2 P5.5 P5.8 P5.11 P5.17 R3.1 R6.1 R8.1 R10.2 R12.1 R15.1 R16.2 R17.1 R18.1 R19.1 R20.1 R28.1 R31.1 R37.2 R41.1 R47.2 R48.2 R49.2 R50.2 R62.1 R64.2 U1.A1 U1.A16 U1.B7 U1.B11 U1.D4 U1.D13 U1.E9 U1.G2 U1.G8 U1.G15 U1.H7 U1.H9 U1.H12 U1.J5 U1.J8 U1.K7 U1.K9 U1.L2 U1.L15 U1.M8 U1.N13 U1.P3 U1.P11 U1.P14 U1.R6 U1.R10 U1.T1 U1.T16 U2.2 U3.0 U4.2 U5.2 U5.8 U5.11 U6.2 U7.2 U8.4 X2.2 X2.4
HREF: P4.16
HSWAPEN: MCU1.61 R28.2 R45.1@194.32,540 U7.4
INIT_B: MCU1.56 U1.R3
MCLK: P4.12
NetC8_2: C8.2 R7.2 R10.1 U5.1
NetC11_1: C11.1 MCU1.47
NetC23_1: C23.1 P1.1 R2.3
NetC25_1: C25.1 MCU1.31
NetC26_2: C26.2 P4.21 R33.1
NetC28_1: C28.1 D1.1 D3.2
NetC28_2: C28.2 C32.2 D7.1 L3.2 U4.1
NetC29_1: C29.1 D1.2 R26.1
NetC32_1: C32.1 D4.2 D5.1
NetC34_2: C34.2 R12.2 R13.1 U2.5
NetC35_1: C35.1 D4.1 R27.1
NetC41_2: C41.2 P4.15 R32.1
NetC51_2: C51.2 C52.2 C54.2 C55.2 D9.2 P1.39 P1.40 U7.5
NetC53_1: C53.1 R37.3 R38.1
NetC108_2: C108.2 MCU1.5 R61.2 U3.25 X2.3
NetC110_2: C110.2 R61.1 U3.26 X2.1
NetD9_1: D9.1 L5.2 U7.1
NetJ1_2: J1.2 U1.T11
NetJ2_2: J2.2 U1.N11
NetJ3_2: J3.2 R42.1
NetL1_1: L1.1 U5.6
NetL2_1: L2.1 U5.10
NetL7_1: L7.1 U2.3
NetLED1_2: LED1.2 R21.2
NetLED2_2: LED2.2 R22.2
NetLED3_1: LED3.1 R43.2
NetMCU1_2: MCU1.2 U1.E16
NetMCU1_7: MCU1.7 R4.1
NetMCU1_20: MCU1.20 R37.1
NetMCU1_24: MCU1.24
NetMCU1_25: MCU1.25
NetMCU1_35: MCU1.35
NetMCU1_37: MCU1.37 R21.1
NetMCU1_38: MCU1.38 R22.1
NetMCU1_41: MCU1.41 P1.28 R14.1 R15.2
NetMCU1_42: MCU1.42 P1.33 R17.2
NetMCU1_43: MCU1.43 P1.34 R18.2
NetMCU1_44: MCU1.44 P1.5 R9.2
NetMCU1_60: MCU1.60 R3.2
NetP1_6: P1.6 R11.2
NetP1_31: P1.31 P1.32 R8.2 R39.1 R41.2
NetP1_36: P1.36 R19.2
NetP1_37: P1.37 R20.2
NetP5_13: P5.13 R54.2
NetP5_15: P5.15 R53.2
NetP5_16: P5.16 R52.2
NetP5_18: P5.18 R36.2 R51.2
NetP5_19: P5.19 R36.1
NetR1_1: R1.1 R2.2
NetR2_1: R2.1 R6.2
NetR5_2: R5.2 R16.1 U5.5
NetR23_1: R23.1 U3.14
NetR24_1: R24.1 U3.11
NetR25_1: R25.1 U3.8
NetR29_1: R29.1 U4.4
NetR30_1: R30.1 R31.2 U4.3
NetR38_2: R38.2 R39.2 U7.3
NetR42_2: R42.2 R45.2@234,540 U1.C4
NetR45_1: R45.1@943,830.32 U1.L11
NetR46_2: R46.2 USB2.1
NetR47_1: R47.1 USB2.5
NetR60_2: R60.2 U3.22
NetR62_2: R62.2 U3.24
NetU3_23: U3.23 USB2.4
PA13: MCU1.46 P2.3
PA14: MCU1.49 P2.2
PC8: MCU1.39
PC10: MCU1.51 U1.G14
PC11: MCU1.52 U1.F16
PC12: MCU1.53 U1.F15
PCLK: P4.8
PD2: MCU1.54
PROGRAM: MCU1.62 R44.2 U1.T2
PWDN: P4.17
RESET: P4.19
SCL: P4.20 R57.2
SDA: P4.22 R56.2
TCK: P3.3 R49.1 U1.C14
TDI: P3.2 R48.1 U1.C12
TDO: P3.1 U1.E14
TMDS_CLK_N: P5.12 U1.T7
TMDS_CLK_P: P5.10 U1.R7
TMDS_D0_N: P5.9 U1.M7
TMDS_D0_P: P5.7 U1.P7
TMDS_D1_N: P5.6 U1.N8
TMDS_D1_P: P5.4 U1.M9
TMDS_D2_N: P5.3 U1.T9
TMDS_D2_P: P5.1 U1.R9
TMS: P3.5 R50.1 U1.A15
USB_HS_CK: MCU1.21 U3.1
USB_HS_D0: MCU1.17 U3.3
USB_HS_D1: MCU1.26 U3.4
USB_HS_D2: MCU1.27 U3.5
USB_HS_D3: MCU1.29 U3.6
USB_HS_D4: MCU1.30 U3.7
USB_HS_D5: MCU1.33 U3.9
USB_HS_D6: MCU1.34 U3.10
USB_HS_D7: MCU1.57 U3.13
USB_HS_DIR: MCU1.10 U3.31
USB_HS_N: U3.19 USB2.2
USB_HS_NXT: MCU1.11 U3.2
USB_HS_P: U3.18 USB2.3
USB_HS_RESET: MCU1.15 R64.1 U3.27
USB_HS_STP: MCU1.8 U3.29
VGH: C30.1 C31.2 D2.2 P1.38 R26.2
VGL: C36.1 C37.2 D6.1 P1.35 R27.2
VSYNC: P4.18
pads on no net: MCU1.3 MCU1.4 MCU1.6 MCU1.9 MCU1.14 MCU1.16 MCU1.22 MCU1.28 MCU1.36 MCU1.45 MCU1.50 P1.4 P1.23 P1.24 P1.26 P1.27 P2.4 P4.24 P5.14 U1.A2 U1.A3 U1.A4 U1.A5 U1.A7 U1.A8 U1.A13 U1.A14 U1.B1 U1.B2 U1.B3 U1.B5 U1.B8 U1.B14 U1.B15 U1.B16 U1.C1 U1.C2 U1.C3 U1.C5 U1.C6 U1.C7 U1.C8 U1.C13 U1.C15 U1.C16 U1.D1 U1.D3 U1.D5 U1.D6 U1.D8 U1.D9 U1.D11 U1.D12 U1.D14 U1.D16 U1.E1 U1.E2 U1.E3 U1.E4 U1.E6 U1.E7 U1.E8 U1.E11 U1.E12 U1.E13 U1.E15 U1.F1 U1.F2 U1.F3 U1.F4 U1.F5 U1.F6 U1.F7 U1.F9 U1.F10 U1.F12 U1.F13 U1.F14 U1.G1 U1.G3 U1.G5 U1.G6 U1.G11 U1.G12 U1.G16 U1.H1 U1.H2 U1.H3 U1.H4 U1.H5 U1.H11 U1.H13 U1.H14 U1.H15 U1.H16 U1.J1 U1.J3 U1.J4 U1.J6 U1.J11 U1.J12 U1.J13 U1.J14 U1.J16 U1.K1 U1.K2 U1.K3 U1.K5 U1.K6 U1.K11 U1.K12 U1.K14 U1.K15 U1.K16 U1.L1 U1.L3 U1.L4 U1.L5 U1.L7 U1.L8 U1.L10 U1.L12 U1.L13 U1.L14 U1.L16 U1.M1 U1.M2 U1.M3 U1.M4 U1.M5 U1.M6 U1.M10 U1.M11 U1.M12 U1.M13 U1.M14 U1.M15 U1.M16 U1.N1 U1.N3 U1.N4 U1.N5 U1.N6 U1.N9 U1.N12 U1.N14 U1.N16 U1.P1 U1.P2 U1.P4 U1.P5 U1.P6 U1.P8 U1.P9 U1.P12 U1.P15 U1.P16 U1.R1 U1.R2 U1.R5 U1.R12 U1.R14 U1.R15 U1.R16 U1.T4 U1.T5 U1.T6 U1.T12 U1.T13 U1.T14 U1.T15 U3.12 U3.15 U3.16 U3.17 U4.6 U6.4
copper on no net:
  other v1: 1706.5,845.94 1706.5,1141.22

## Polygon pours and split planes (outlines as drawn)
1.2 on Top Layer "Bottom Layer-No Net" (solid, remove dead copper, pour order 6): 795,802 914,802 914,801 933,782 934,781 934,662 874,602 756,602 735,623 735,741
GND on Internal Plane 1 (split plane): 1948.41,20.1 20.1,20.1 20.1,1948.41 1948.41,1948.41

## Keep-outs
Keep-Out Layer:
  the board outline again, w10